# Altium PCB Motor_Driver_IR2184_Board_V1.0.PcbDoc
Units mil, origin at the board's own origin, x right, y up, seen from the top; angles counter-clockwise.
Board outline 3070.87 x 1692.91 mil, 4 copper layers (TOP, GND02, POWER03, Bottom), stack 23.756 mil thick; 65 components, 43 nets, 188 pads, 240 vias.
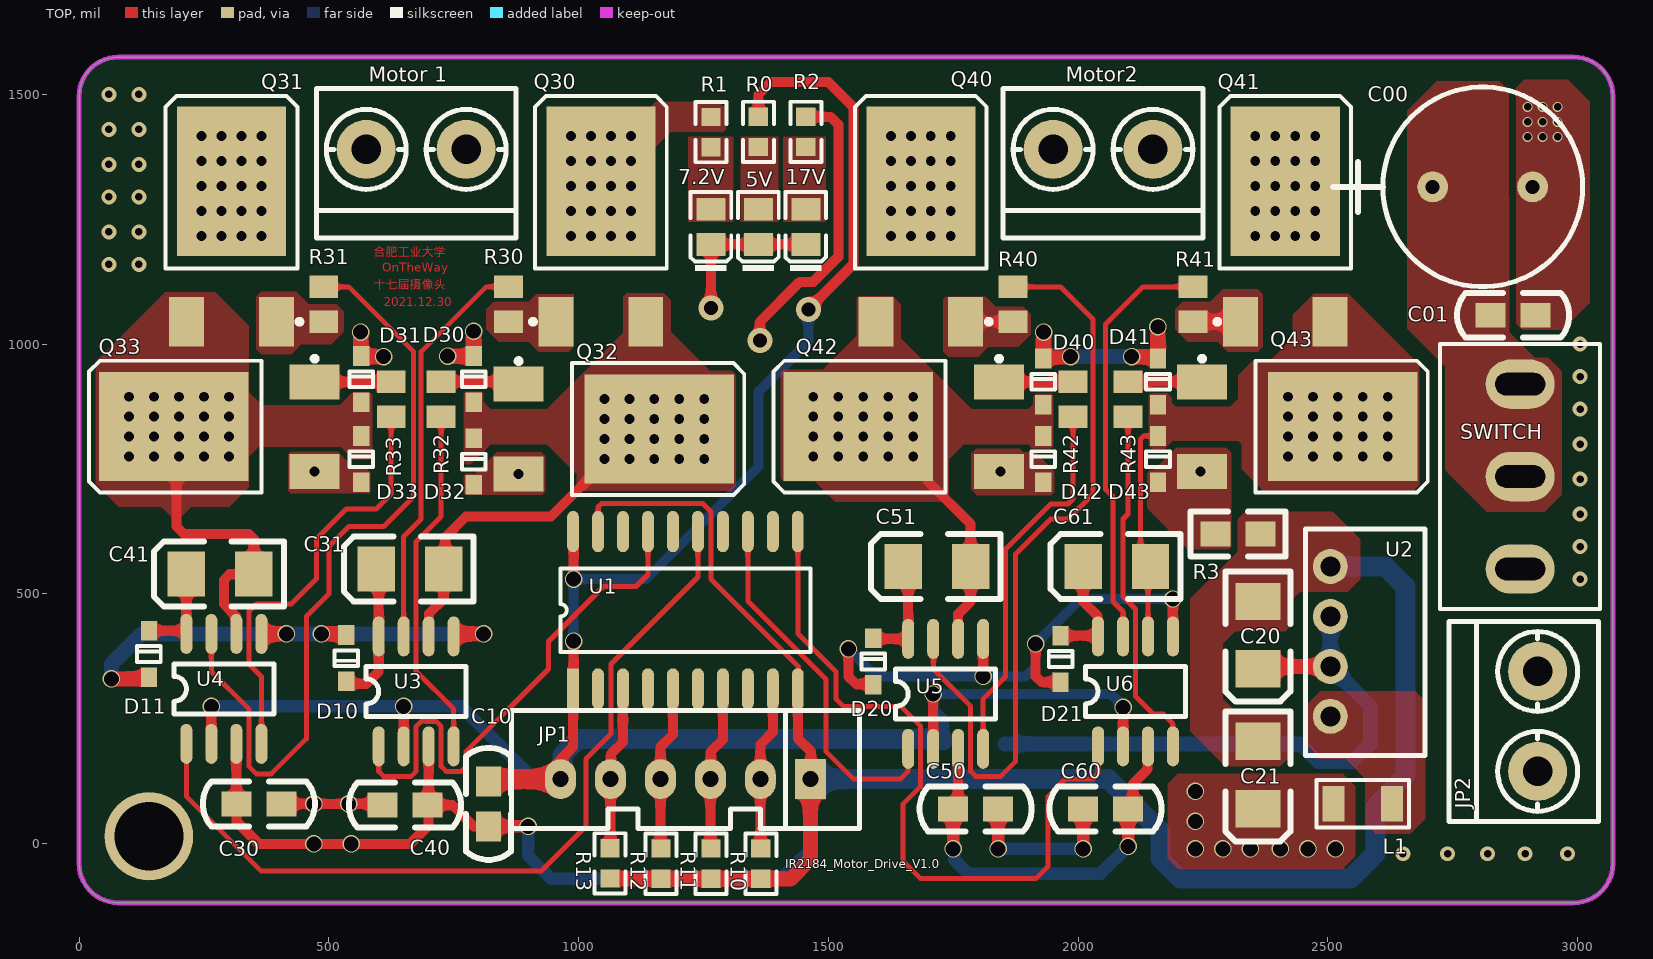
[diagram p0: TOP view]
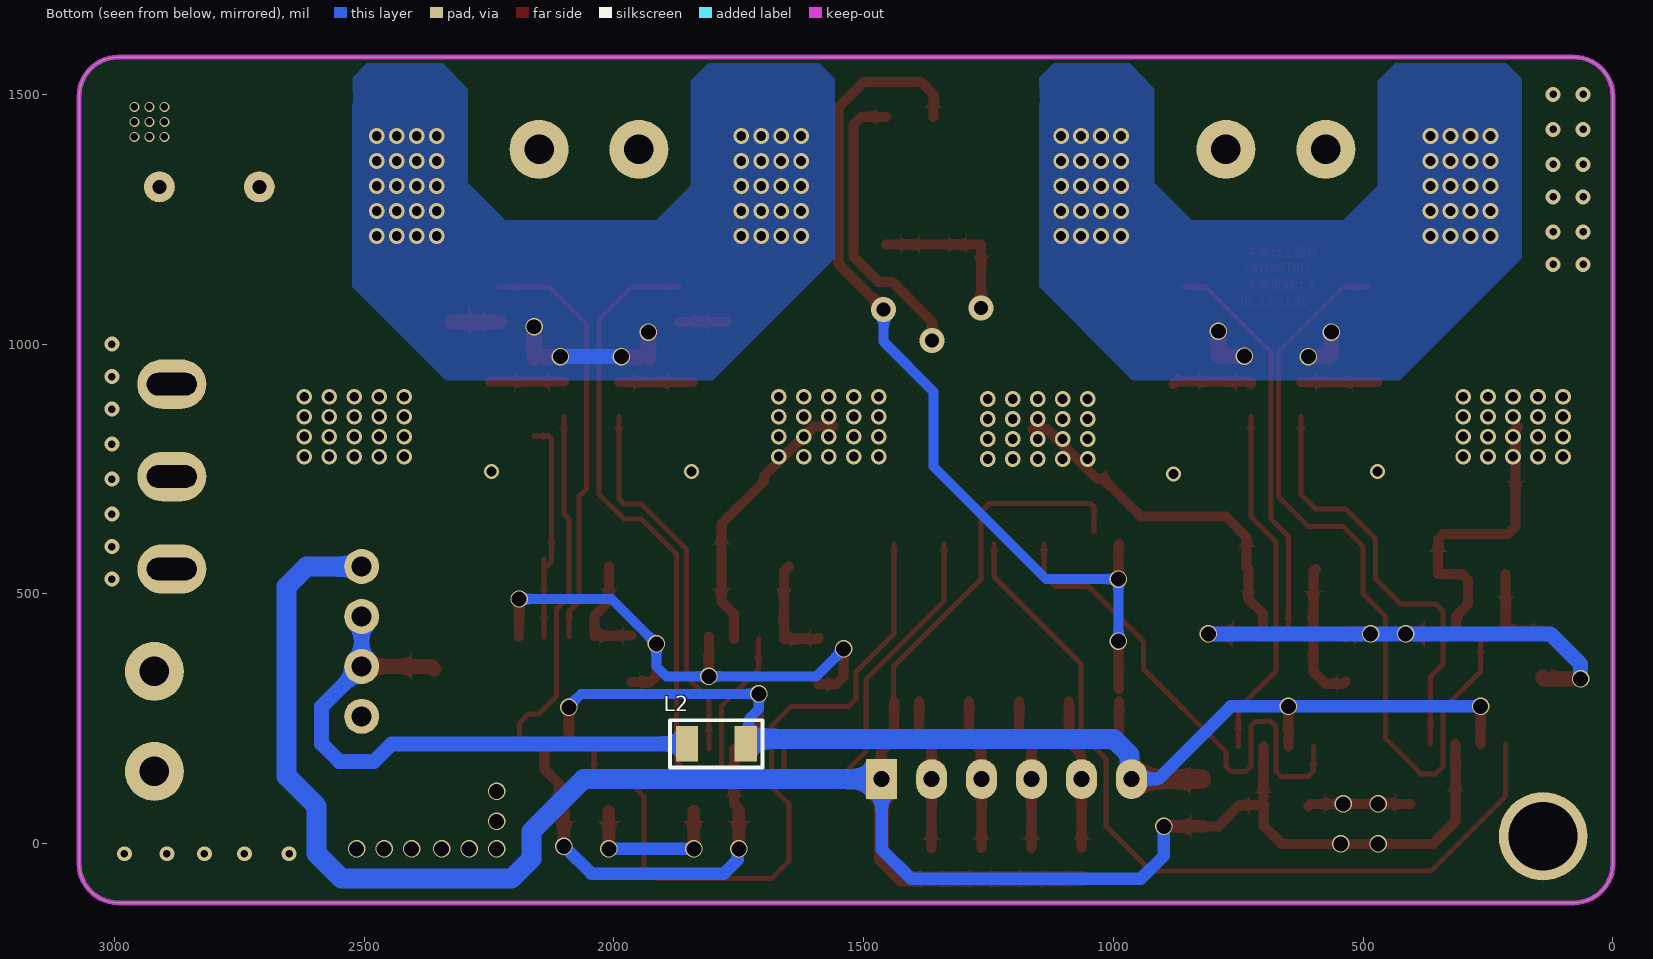
[diagram p1: Bottom view, seen from below]
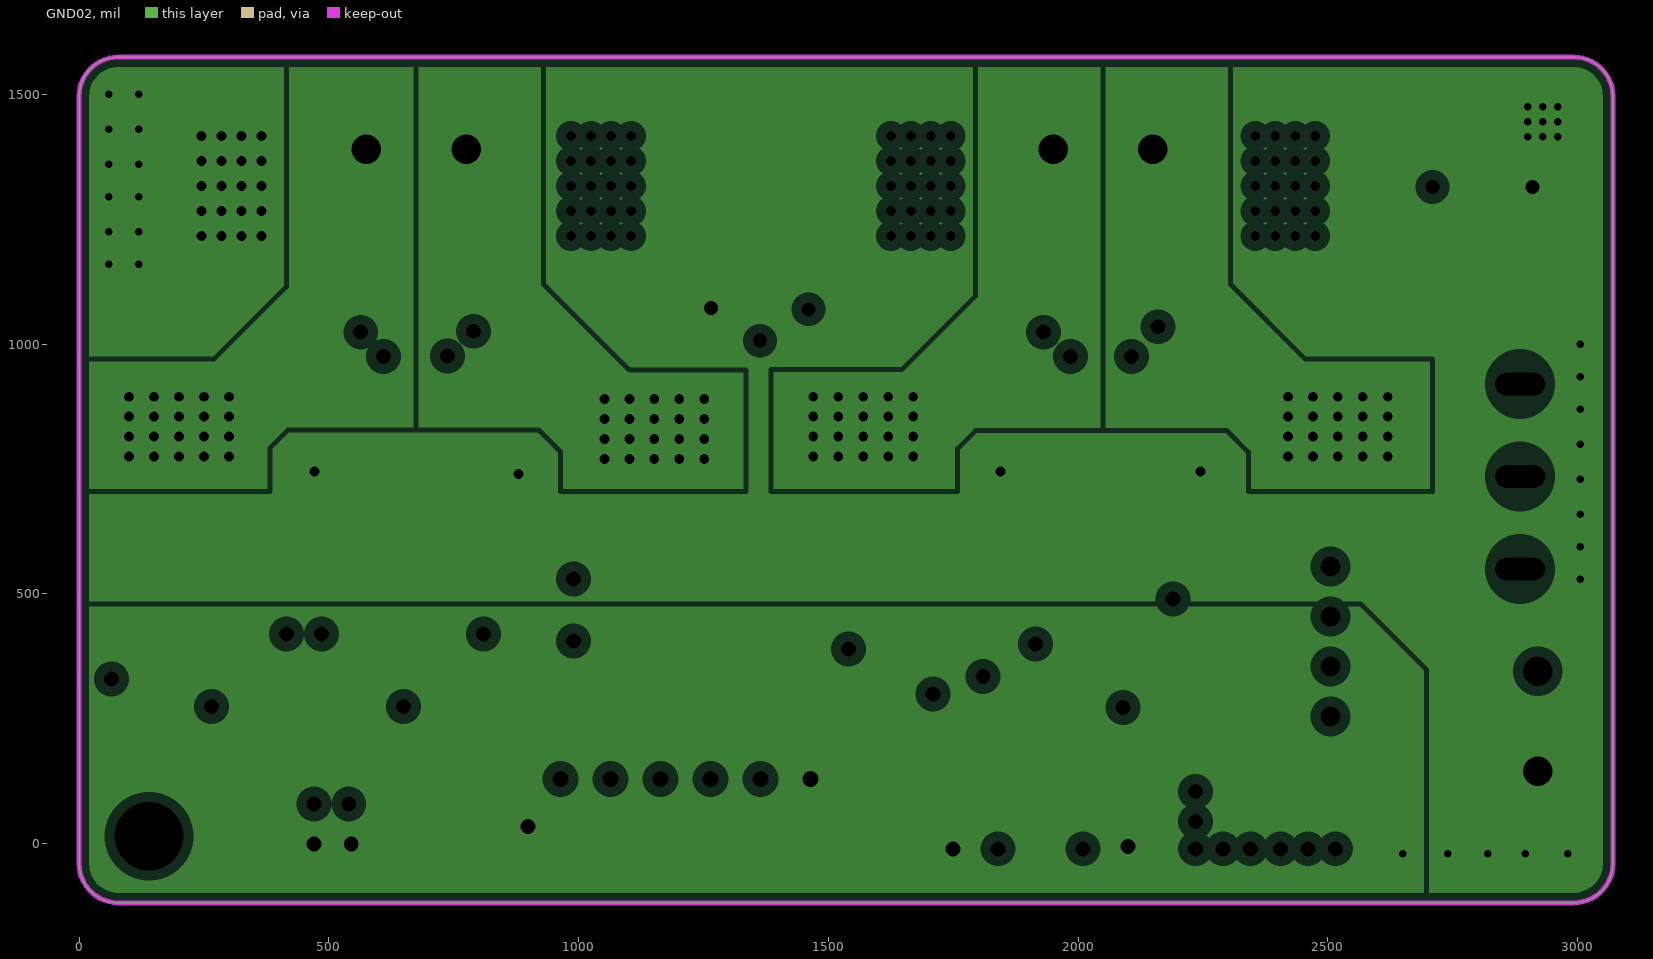
[diagram p2: GND02, clearances drawn from the general rule]
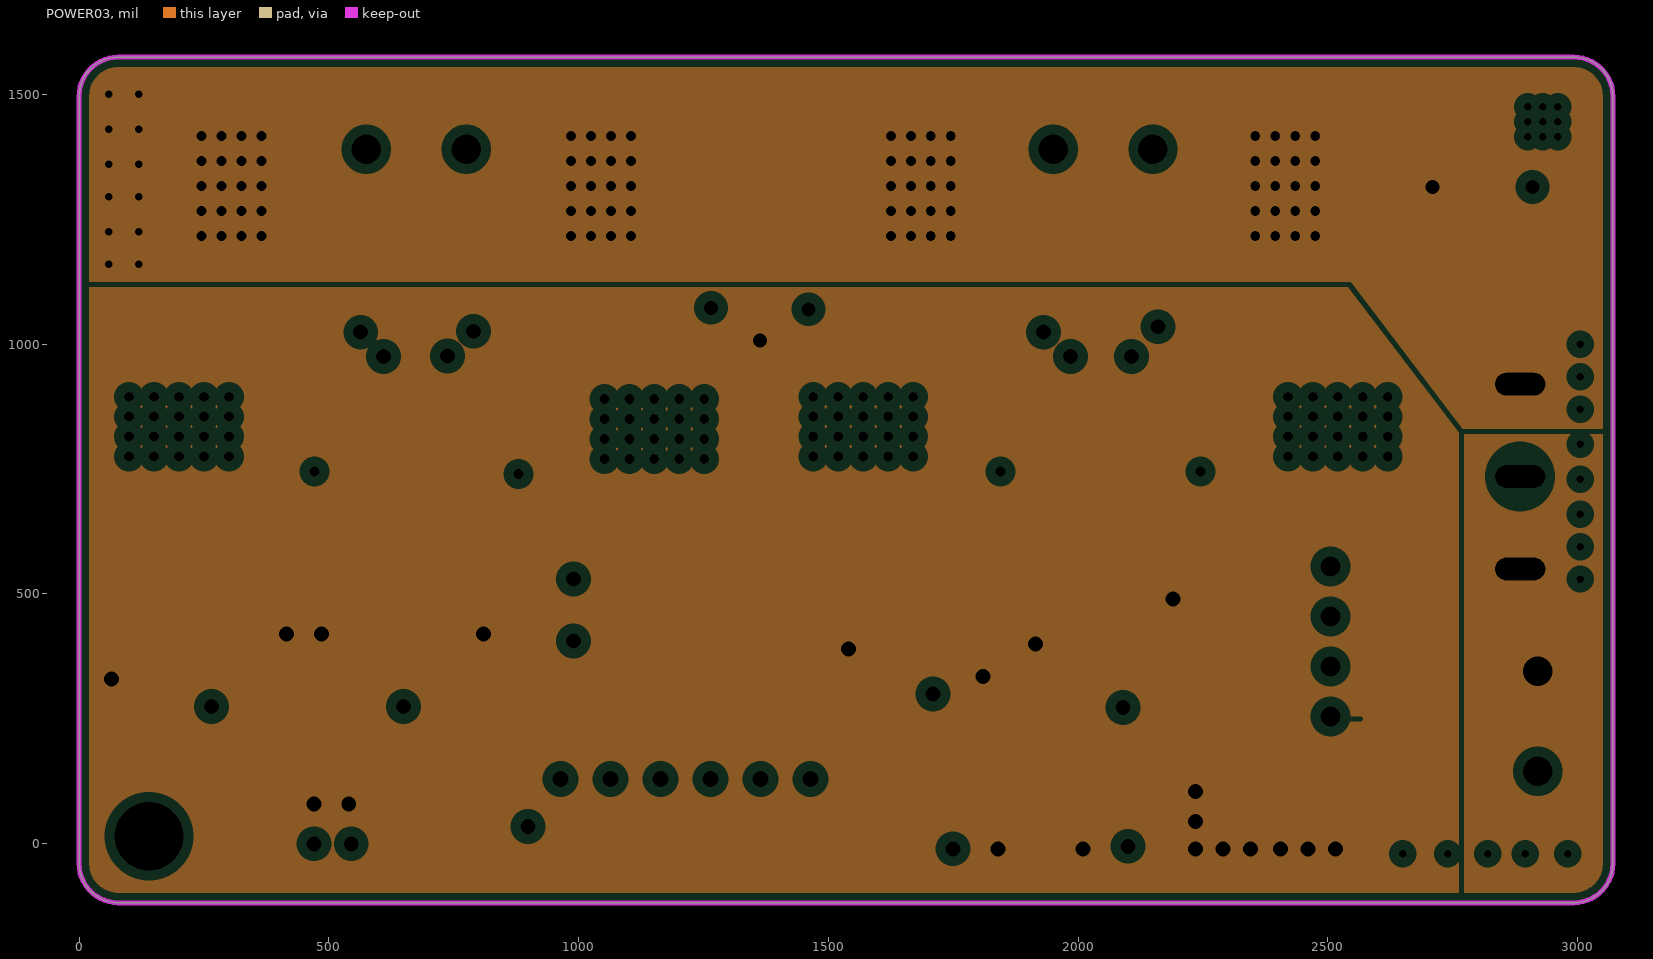
[diagram p3: POWER03, clearances drawn from the general rule]
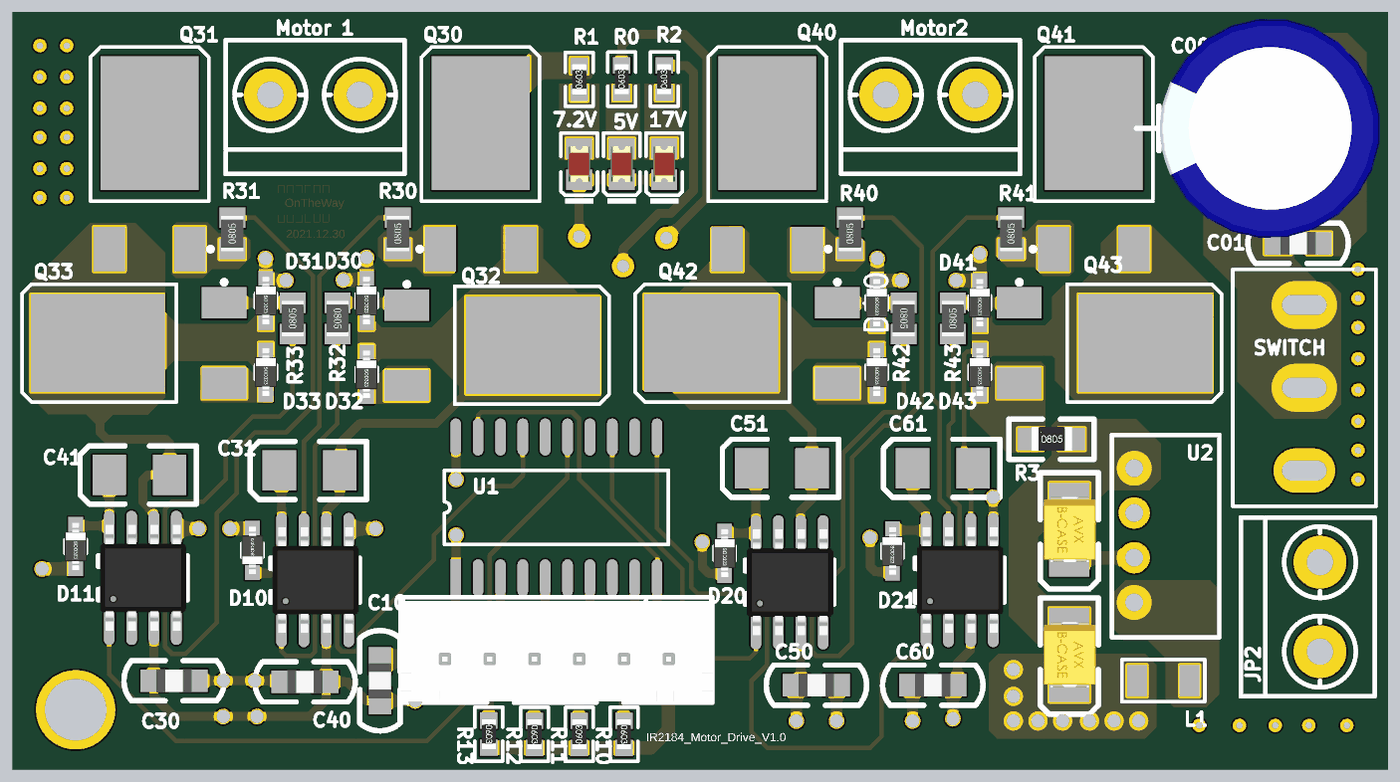
[diagram p4: 3D render of the assembled board from above, using the file's embedded part models]

## Layer stack, top to bottom
Top Solder: solder mask 0.4, Solder Resist, Dk 3.5
TOP: signal copper 1.4
Dielectric 2: prepreg 2.8, PP-006, Dk 4.1
GND02: plane copper 1.378, net (Multiple Nets)
Dielectric 1: dielectric 12.6, FR-4, Dk 4.8
POWER03: plane copper 1.378, net (Multiple Nets)
Dielectric 3: prepreg 2.8, PP-006, Dk 4.1
Bottom: signal copper 1.4
Bottom Solder: solder mask 0.4, Solder Resist, Dk 3.5

## Board outline
0,-39.37 ccw(c78.74,-39.37) 78.74,-118.11 78.52,-118.11 2992.12,-118.11 2992.13,-118.11 ccw(c2992.13,-39.37) 3070.87,-39.37 3070.87,1496.06 ccw(c2992.13,1496.06) 2992.13,1574.8 78.74,1574.8 ccw(c78.74,1496.06) 0,1496.06

## Design rules (kind name [scope] priority, off if disabled: settings)
Clearance [All] p1: gap=2 ignorepadtopadclearanceinfootprint=FALSE
HoleSize [All] p1 off: absolutevalues=TRUE maxlimit=100 minlimit=1 maxpercent=80.000 minpercent=20.000
HoleToHoleClearance [All] p1 off: gap=10 allowstackedmicrovias=TRUE
MinimumSolderMaskSliver [All] p1 off: minsoldermaskwidth=10
PlaneClearance [All] p1: clearance=20
PlaneConnect [All] p1: planeconnectstyle=Direct reliefexpansion=20 reliefentries=4 reliefconductorwidth=10 reliefairgap=10
PolygonConnect [All] p1: connectstyle=Direct reliefconductorwidth=10 reliefentries=4 polygonreliefangle="90 Angle" airgapwidth=10
RoutingVias [All] p1: holewidth=28 width=50 viastyle="Through Hole" minholewidth=28 minwidth=50 maxholewidth=28 maxwidth=50
SilkToSilkClearance [All] p1 off: silktosilkclearance=10
SilkToSolderMaskClearance [IsPad] p1 off: minsilkscreentomaskgap=10 clearancetoexposedcopper=TRUE
SolderMaskExpansion [All] p1: expansion=4
Width PGND [InNet('PGND')] p1: maxlimit=50 minlimit=10 preferedwidth=30
Width GND [InNet('GND')] p2: maxlimit=50 minlimit=10 preferedwidth=30
Width 12V [InNet('12V')] p3: maxlimit=50 minlimit=10 preferedwidth=30
Width "7.2V In" [InNet('7.2V In')] p4: maxlimit=50 minlimit=10 preferedwidth=30
Width 7.2V [InNet('7.2V')] p5: maxlimit=50 minlimit=10 preferedwidth=30
Width 5V [InNet('5V')] p6: maxlimit=50 minlimit=10 preferedwidth=30
Width [All] p7: maxlimit=30 minlimit=10 preferedwidth=20
23 further rules are at their usual default settings.

## Components (designator, comment, footprint, x,y, rotation, side; value= is the part's Value field where it differs from the comment)
5V "" 0805_LED_S1 1360,1235 r90 top
7.2V "" 0805_LED_S1 1265,1235 r90 top
17V "" 0805_LED_S1 1455,1235 r90 top
C00 "470uF/25V" RB.2/.4 2710,1315 r180 top
C01 "100nF" 0805C 2916,1058 r180 top
C10 "100nF" 0805C 820,125 r270 top
C20 "" 3528 2360,350 r270 top value=4.7uF/25V
C21 "" 3528 2360,70 r270 top value=10uF/16V
C30 "100nF" 0805C 405,80 r180 top
C31 "10uF/35V" 3528 595,550 r180 top
C40 "100nF" 0805C 607.5,77.5 r0 top
C41 "10uF/35V" 3528 215,540 r180 top
C50 "100nF" 0805C 1840,70 r180 top
C51 "10uF/35V" 3528 1650,555 r180 top
C60 "100nF" 0805C 2010,70 r0 top
C61 "10uF/35V" 3528 2010,555 r180 top
D10 "1N5819" SOD-323 535,371.46 r90 top
D11 "1N5819" SOD-323 140,380 r270 top
D20 "1N5819" SOD-323 1590,365 r270 top
D21 "1N5819" SOD-323 1965,370 r270 top
D30 "1N5819" SOD-323 790,930 r270 top
D31 "1N5819" SOD-323 565,930 r270 top
D32 "1N5819" SOD-323 790,765 r270 top
D33 "1N5819" SOD-323 565,770 r270 top
D40 "1N5819" SOD-323 1930,925 r270 top
D41 "1N5819" SOD-323 2160,925 r270 top
D42 "1N5819" SOD-323 1930,770 r270 top
D43 "1N5819" SOD-323 2160,770 r270 top
JP1 "HEADER 6" SIP6N 1464,129.44 r180 top
JP2 "HEADER 2" KF301-2P#1 2920,245 r180 top
L1 "6.8uH" 1206_L 2570,80 r180 top
L2 "6.8uH" 1206_L 1795,200 r180 bottom
Motor2 "HEADER 2" KF301-2P#1 2050,1390 r270 top
"Motor 1" "HEADER 2" KF301-2P#2 675,1390 r270 top
Q30 "IR7843" LR7843#1 1044.76,1186.73 r270 top
Q31 "IR7843" LR7843#2 305.24,1186.73 r270 top
Q32 "IR7843" LR7843#1 1021.73,830.24 r180 top
Q33 "IR7843" LR7843#2 330,835 r0 top
Q40 "IR7843" LR7843#2 1685.24,1186.73 r270 top
Q41 "IR7843" LR7843#1 2414.76,1186.73 r270 top
Q42 "IR7843" LR7843#2 1700,835 r0 top
Q43 "IR7843" LR7843#1 2390,835 r180 top
R0 "4.7K" 0603_R 1360,1425 r90 top
R1 "4.7K" 0603_R 1265,1424.69 r90 top
R2 "4.7K" 0603_R 1455,1425 r90 top
R3 "0" 0805R 2275,620 r0 top
R10 "10K" 0603_R 1365,-40 r270 top
R11 "10K" 0603_R 1265,-40 r90 top
R12 "10K" 0603_R 1165,-40 r270 top
R13 "10K" 0603_R 1062.99,-39.37 r270 top
R30 "20" 0805 860,1080 r90 top
R31 "20" 0805 490,1080 r90 top
R32 "20" 0805 725,890 r270 top
R33 "20" 0805 625,890 r90 top
R40 "20" 0805 1870,1080 r90 top
R41 "20" 0805 2230,1080 r90 top
R42 "20" 0805 1990,890 r270 top
R43 "20" 0805 2100,890 r90 top
SWITCH "Header 3" KEY-3P 2885,920.08 r90 top
U1 "74HC245" SOP20 989,310 r90 top
U2 "B0512S-1W" SIP4_B_S-1W 2455,177 r0 top
U3 "IR2184" SO-8 600,195 r90 top
U4 "IR2184" SO-8 215,200 r90 top
U5 "IR2184" SO-8 1660,190 r90 top
U6 "IR2184" SO-8 2040,195 r90 top

## Footprints (in the part's own frame and the unit in brackets; to place one, negate y for a bottom-side part, rotate by r counter-clockwise, add the part's x,y. Pads: shape width x height; smd on the part's side, far side on the other; paste and mask are expansions set on the pad)
0603_R [mm]
  rect 0.93x0.98 smd: 1(-0.77,0) 2(0.77,0)
  silkscreen extent -1.53,-0.79 1.54,0.79, body extent -0.85,-0.4 0.85,0.4, height 0.56
0805 [mm]
  rect 1.16x1.47 smd: 1(-0.89,0) 2(0.89,0)
  body extent -1,-0.63 1,0.63, height 0.55
0805_LED_S1 [mm]
  rect 1.16x1.47 smd: A(0.89,0) K(-0.89,0)
  silkscreen extent -2.24,-1.04 1.77,1.03, body extent -1.01,-0.62 1.01,0.62, height 1.1
0805C [mil]
  rect 60x50 smd: 1(0,0) 2(90,0)
  silkscreen extent -67,-45 157,45, body extent 6,-26 84,26, height 29
0805R [mil]
  rect 60x50 smd: 1(0,0) 2(90,0)
  silkscreen extent -50,-45 140,45, body extent 1,-26 91,28, height 30
1206_L [mm]
  rect 1.13x1.8 smd: 1(-1.49,0) 2(1.49,0)
  silkscreen extent -2.36,-1.2 2.35,1.2
3528 [mil]
  rect 75x90 smd: 1(0,0) 2(-135,0)
  silkscreen extent -195,-65 65,65, body extent -141,-57 5,59, height 80
KEY-3P [mil]
  oval 99x138 hole 45 slot 100 at 90 deg: 1(-370.08,0) 2(-185.04,0) 3(0,0)
  silkscreen extent -450,-160 80,160
KF301-2P#1 [mm]
  round 3 hole 1.5: 1(0,2.54) 2(0,-2.54)
  silkscreen extent -3.1,-5.08 4.5,5.08
KF301-2P#2 [mm]
  round 3 hole 1.5: 1(0,-2.54) 2(0,2.54)
  silkscreen extent -3.1,-5.08 4.5,5.08
LR7843#1 [mm]
  rect 7.6x5.55 smd: 1(-3.556,0)
  rect 2.54x1.778 smd: 2(3.6,-2.28) 3(3.6,2.28)
  silkscreen extent -7.87,-3.58 3.72,3.35
LR7843#2 [mm]
  rect 7.6x5.55 smd: 1(-3.556,0)
  rect 2.54x1.778 smd: 2(3.6,2.28) 3(3.6,-2.28)
  silkscreen extent -7.87,-3.35 3.72,3.58
RB.2/.4 [mil]
  round 62 hole 28: 1(0,0) 2(-200,0)
  silkscreen extent -300,-200 200,200, body extent -345,-246 147,246, height 986
SIP4_B_S-1W [mil]
  round 70 hole 40: 1(50,378) 2(50,278) 3(50,178) 4(50,78)
  silkscreen extent 0,0 240,453
SIP6N [mil]
  rect 62x80 hole 32: 1(0,0)
  oval 62x80 hole 32: 2(100,0) 3(200,0) 4(300,0) 5(400,0) 6(500,0)
  silkscreen extent -98,-138 598,98, body extent -99,-129 597,95, height 277
SO-8 [mil]
  oval 80x24 smd: 1(0,0) 2(0,-50) 3(0,-100) 4(0,-150) 5(220,-150) 6(220,-100) 7(220,-50) 8(220,0)
  silkscreen extent 60,-175 160,25, body extent -8,-172 228,20, height 67
SOD-323 [mm]
  rect 1x0.83 smd: 1(1.18,0) 2(-1.18,0)
  silkscreen extent -0.4,-0.6 0.4,0.6, body extent -1.35,-0.62 1.35,0.63, height 1.1
SOP20 [mm]
  rect 2.1x0.6 smd: 1(0,0)
  oval 2.1x0.6 smd: 2(0,-1.27) 3(0,-2.54) 4(0,-3.81) 5(0,-5.08) 6(0,-6.35) 7(0,-7.62) 8(0,-8.89) 9(0,-10.16) 10(0,-11.43) 11(8,-11.43) 12(8,-10.16) 13(8,-8.89) 14(8,-7.62) 15(8,-6.35) 16(8,-5.08) 17(8,-3.81) 18(8,-2.54) 19(8,-1.27) 20(8,0)
  silkscreen extent 1.89,-12.06 6.11,0.64

## Part data
5V 7.2V 17V: library part LED
C00 C31 C41 C51 C61: library part CAPACITOR, "Capacitor"
C01 C10 C30 C40 C50 C60: library part CAP, "Capacitor"
C20 C21: library part "Cap Pol3", "Polarized Capacitor (Surface Mount)", LatestRevisionDate=29-May-2009, LatestRevisionNote="IPC-7351 Footprint Added.", PackageDescription="Chip Capacitor", PackageReference=C0805, Published=8-Jun-2000, Publisher="Altium Limited"
D10 D11 D20 D21: library part Diode, "Default Diode", Code_JEDEC=DO-214-AB, LatestRevisionDate=17-Jul-2002, LatestRevisionNote="Re-released for DXP Platform.", PackageDescription="DO-214-AB/SMC; 2 C-Bend Leads; Body 7.9 x 5.9 mm, inc. leads (LxW)", PackageReference=SMC, PackageVersion=Sep-1996, Published=8-Jun-2000, Publisher="Altium Limited"
D30 D31 D32 D33 D40 D41 D42 D43: library part "DIODE SCHOTTKY", "Schottky Diode"
L1 L2: library part INDUCTOR2
Q30 Q31 Q32 Q33 Q40 Q41 Q42 Q43: library part MOSFET-N, "N-Channel MOSFET", LatestRevisionDate=17-Jul-2002, LatestRevisionNote="Re-released for DXP Platform.", PackageDescription="TO, Flat Index; 3 In-Line, Axial Leads; Body Dia. 4.6mm; Lead Dia. 0.5 mm (max)", PackageReference=E3, PackageVersion=1995/1996, Published=8-Jun-2000, Publisher="Altium Limited"
R0 R1 R2 R3 R10 R11 R12 R13 R30 R31 R32 R33 R40 R41 R42 R43: library part RES2
SWITCH: "Header, 3-Pin", LatestRevisionDate=17-Jul-2002, LatestRevisionNote="Re-released for DXP Platform.", Publisher="Altium Limited"
U2: library part "4 HEADER", "4 Pin Header"

## Free pads (board coordinates)
  round 177.17 hole 137.8: 2(140,15)

## Via types
v1: diameter 31.5, hole 19.68, TOP to Bottom, 160 vias
v2: diameter 35, hole 30, TOP to Bottom, 39 vias
v3: diameter 30, hole 15, TOP to Bottom, 25 vias
v4: diameter 20, hole 15, TOP to Bottom, 9 vias
v5: diameter 30, hole 20, TOP to Bottom, 4 vias
v6: diameter 50, hole 28, TOP to Bottom, 3 vias

## Nets (pads, with @x,y where several pads share a name; then routed paths per layer and width w, separated by ;. In a path a pad name is that pad's centre, name@x,y a point inside that pad or via, vN(x,y) a via of type N, cw(c..) or ccw(c..) an arc to the next point about the centre after c; other vN are vias at no path point)
5V: C10.1 JP1.6 L2.2 R0.2 U1.1 U1.20 U3.2 U4.2 U5.2 U6.2 | length 4508.2
  TOP w20: U4.2 v2(265,275) ; U3.2 v2(650,275) ; C10.1 C10.1@824.44,129.44 ; JP1.6@963,129.44 963,168 989,194 U1.1@989,285 ; U1.1 990,311 v2(990,405.48) ; U1.20@989,599.96 990,598.96 v2(990,530) ; R0.2 1360,1500 1385,1525 1500,1525 1550,1475 1550,1160 v6(1460,1070) ; U5.2@1710,200 v2(1710,300) ; U6.2@2090,205 v2(2090,273.21)
  TOP w40: C10.1@824.44,129.44 JP1.6@963,129.44
  Bottom w20: v2(990,405.48) v2(990,530) 1135,530 1360,755 1360,905 1460,1005 v6(1460,1070) ; L2.2 1730,206.34 1730,250 1710,270 v2(1710,300) 2065.94,300 2090,275.94 v2(2090,273.21)
  Bottom w25: v2(265,275) v2(650,275) 765,275 910.14,129.86 963.59,129.86 JP1.6
  Bottom w40: JP1.6@967.5,162.5 967.5,177.5 1000,210 1726.34,210 L2.2@1730,206.34
7.2V: C00.1 C01.2 D30.2 D31.2 D40.2 D41.2 Q30.1 Q31.1 Q40.1 Q41.1 R1.2 SWITCH.2 SWITCH.3 | length 545.2
  TOP w30: v2(564,1024) 564,977.46 D31.2 565,976.34 566.34,975 v2(610,975) ; v2(738,976) 789.53,976 D30.2 v2(790,1026) ; v2(1931,1024) D40.2@1931,974.66 ; v2(1985,975) 1931.34,975 D40.2@1931,974.66 ; v2(2107,975) 2158.66,975 D41.2@2160,973.66 ; D41.2 D41.2@2160,973.66 ; v2(2160,1035) D41.2@2160,973.66 ; D40.2@1931,974.66 1931,972.46 D40.2 1930,973.66 D40.2@1931,974.66
  Bottom w30: v2(1985,975) v2(2107,975)
  other v1: 245.24,1216.73 285.24,1216.73 325.24,1216.73 365.24,1216.73 984.76,1216.73 1024.76,1216.73 1064.76,1216.73 1104.76,1216.73 1625.24,1216.73 1665.24,1216.73 1705.24,1216.73 1745.24,1216.73 2354.76,1216.73 2394.76,1216.73 2434.76,1216.73 2474.76,1216.73 245.24,1266.73 285.24,1266.73 325.24,1266.73 365.24,1266.73 984.76,1266.73 1024.76,1266.73 1064.76,1266.73 1104.76,1266.73 1625.24,1266.73 1665.24,1266.73 1705.24,1266.73 1745.24,1266.73 2354.76,1266.73 2394.76,1266.73 2434.76,1266.73 2474.76,1266.73 245.24,1316.73 285.24,1316.73 325.24,1316.73 365.24,1316.73 984.76,1316.73 1024.76,1316.73 1064.76,1316.73 1104.76,1316.73 1625.24,1316.73 1665.24,1316.73 1705.24,1316.73 1745.24,1316.73 2354.76,1316.73 2394.76,1316.73 2434.76,1316.73 2474.76,1316.73 245.24,1366.73 285.24,1366.73 325.24,1366.73 365.24,1366.73 984.76,1366.73 1024.76,1366.73 1064.76,1366.73 1104.76,1366.73 1625.24,1366.73 1665.24,1366.73 1705.24,1366.73 1745.24,1366.73 2354.76,1366.73 2394.76,1366.73 2434.76,1366.73 2474.76,1366.73 245.24,1416.73 285.24,1416.73 325.24,1416.73 365.24,1416.73 984.76,1416.73 1024.76,1416.73 1064.76,1416.73 1104.76,1416.73 1625.24,1416.73 1665.24,1416.73 1705.24,1416.73 1745.24,1416.73 2354.76,1416.73 2394.76,1416.73 2434.76,1416.73 2474.76,1416.73
  other v3: 60,1160 120,1160 60,1225 120,1225 60,1295 120,1295 60,1360 120,1360 60,1430 120,1430 60,1500 120,1500
"7.2V In": JP2.2 SWITCH.1
17V: C21.1 C30.1 C40.1 C50.1 C60.1 D10.1 D11.1 D20.1 D21.1 L1.2 R2.2 U3.5 U4.5 U5.5 U6.5 | length 3275.9
  TOP w20: C30.1 v2(470,80) v2(540,80) 605,80 C40.1 C40.1@610,75 ; v6(1363,1007) 1363,1045 1443,1125 1470,1125 1520,1175 1520,1440 1504.68,1455.32 R2.2 ; v2(1540,390) 1540,335 1555.38,319.62 1588.92,319.62 D20.1 ; v2(1810,335) U5.5 U5.5@1810,415 ; v2@1915,395 1915,335.26 1926.72,323.54 D21.1 ; U6.5 v2(2190,490)
  TOP w25: v2(1840,-10) C50.1@1840,65 ; v2(2010,-10) C60.1@2010,65
  TOP w30: v2(65,330) 138.66,330 140,331.34 D11.1 ; U4.5@375,420 v2(415,420) ; v2(485,420) 533.66,420 535,418.66 D10.1 ; U3.5@760,420 v2(810,420)
  Bottom w20: v2(1540,390) 1595,335 v2(1810,335) 1895,335 1915,355 v2(1915,400) 2005,490 v2(2190,490)
  Bottom w25: v2(1840,-10) v2(2010,-10)
  Bottom w30: v2(65,330) 65,360 125,420 v2(415,420) v2(485,420) v2(810,420)
  other v2: 2235,-10 2290,-10 2345,-10 2405,-10 2460,-10 2515,-10 2235,45 2235,105
AHO1: R30.2 U3.7 | length 813.4
  TOP w10: U3.7 650,615 685,650 685,985 815.04,1115.04 R30.2
AHO2: R40.2 U5.7 | length 1559.3
  TOP w10: U5.7 1710.59,409.41 1710.59,349.41 1785,275 1785,145 1795,135 1845,135 1875,165 1875,580 1945,650 1980,650 2030,700 2030,1050 1964.96,1115.04 R40.2
AHS1: "Motor 1.2" C31.2 D30.1 D32.2 Q30.3 Q32.1 U3.6 | length 730.4
  TOP w20: U3.6 700.77,415.77 700.77,460.77 730,490 C31.2 733.28,553.28 733.28,613.28 775,655 945,655 1020.98,730.98 1034.2,730.98 1133.45,830.24 Q32.1
  other v1: 1051.73,770.24 1101.73,770.24 1151.73,770.24 1201.73,770.24 1251.73,770.24 1051.73,810.24 1101.73,810.24 1151.73,810.24 1201.73,810.24 1251.73,810.24 1051.73,850.24 1101.73,850.24 1151.73,850.24 1201.73,850.24 1251.73,850.24 1051.73,890.24 1101.73,890.24 1151.73,890.24 1201.73,890.24 1251.73,890.24
AHS2: C51.2 D40.1 D42.2 Motor2.2 Q40.3 Q42.1 U5.6 | length 552.2
  TOP w20: Q42.1 1600.35,835 1699.61,735.75 1699.61,725.39 1785,640 C51.2 1785,485 1760,460 U5.6
  other v1: 1470,775 1520,775 1570,775 1620,775 1670,775 1470,815 1520,815 1570,815 1620,815 1670,815 1470,855 1520,855 1570,855 1620,855 1670,855 1470,895 1520,895 1570,895 1620,895 1670,895
ALO1: R32.2 U3.4 | length 711.7
  TOP w10: R32.2 725,655 675,605 675,345 750,270 U3.4
ALO2: R42.2 U5.4 | length 760
  TOP w10: U5.4 1810,290 1855,335 1855,590 1945,680 1980,680 1990,690 R42.2
BHO1: R31.2 U4.7 | length 1585.2
  TOP w10: U4.7 265,345 340,270 340,155 355,140 385,140 455,210 455,455 500,500 500,595 540,635 610,635 670,695 670,985 540,1115 R31.2 R31.2
BHO2: R41.2 U6.7 | length 845.6
  TOP w10: U6.7 2090,465 2070,485 2070,695 2055,710 2055,1040 2130.04,1115.04 R41.2
BHS1: "Motor 1.1" C41.2 D31.1 D33.2 Q31.3 Q33.1 U4.6 | length 620.9
  TOP w20: Q33.1 195,830 195,635 210,620 340,620 350,610 C41.2 301.72,540 290,528.28 290,480 314.23,455.77 314.23,420.77 U4.6
  other v1: 100,775 150,775 200,775 250,775 300,775 100,815 150,815 200,815 250,815 300,815 100,855 150,855 200,855 250,855 300,855 100,895 150,895 200,895 250,895 300,895
BHS2: C61.2 D41.1 D43.2 Motor2.1 Q41.3 Q43.1 U6.6 | length 451.8
  TOP w10: C61.2@2135,555 2125,565 2125,810 2131.46,816.46 D43.2 ; U6.6 2140,555 C61.2@2140,570
  other v1: 2420,775 2470,775 2520,775 2570,775 2620,775 2420,815 2470,815 2520,815 2570,815 2620,815 2420,855 2470,855 2520,855 2570,855 2620,855 2420,895 2470,895 2520,895 2570,895 2620,895
BLO1: R33.1 U4.4 | length 859.5
  TOP w10: U4.4 365,335 340,360 340,465 355,480 425,480 475,530 475,610 535,670 595,670 625,700 R33.1
BLO2: R43.1 U6.4 | length 717.2
  TOP w10: R43.1 2100,660 2090,650 2090,495 2115,470 2115,295 2150,260 2170,260 2189.41,240.59 2189.41,195.59 U6.4
GND: C10.2 C20.2 C21.2 C30.2 C40.2 C50.2 C60.2 JP1.1 R3.2 R10.2 R11.1 R12.2 R13.2 U1.10 U1.19 U2.1 U3.3 U4.3 U5.3 U6.3 | length 6030.1
  TOP w10: U1.19 1039,674 1045.86,680.86 1249.14,680.86 1265,665 1265,530 1440,355 1440,286 U1.10@1439,285
  TOP w20: U4.3 C30.2 315,45 360,0 663.28,0 700,36.72 C40.2@700,75 ; C40.2 747.5,77.5 790,35 C10.2 ; C40.2@700,90 U3.3 ; U1.10@1439,285 1439,211 1465,185 1465,98 JP1.1@1464,97 ; C50.2 1760,80 U5.3 ; C60.2 2110,80 2110,120 2139.23,149.23 2139.23,194.23 U6.3
  TOP w25: C10.2 C10.2 v2(899,34.96) ; v2(1750,-10) C50.2@1750,65 ; v2(2100,-5) C60.2@2100,60
  TOP w30: R13.2 1164.37,-69.69 R12.2 R11.1 R10.2 1424.68,-70.32 1464,-31 JP1.1@1464,97
  Bottom w25: v2(899,34.96) 899,-24 945,-70 1405,-70 1464,-11 JP1.1 ; v2(1750,-10) 1751.91,-11.91 1751.91,-31.91 1780,-60 2045,-60 v2(2100,-5)
  Bottom w40: JP1.1 2060.56,129.44 2165,25 2165,-30 2205,-70 2545,-70 2595,-20 2595,75 2655,135 2655,515 2615,555 U2.1
  other v2: 470,0 545,0
  other v3: 2650,-20
Motor_In1: U1.17 U3.1 | length 1054.4
  TOP w10: U3.1 600,145 610,135 665,135 675,145 675,235 685.86,245.86 694.14,245.86 695,245 715,245 725,235 725,155 735,145 765,145 775,155 775,185 940,350 940,405 1050,515 1115,515 1139,539 U1.17@1139,599.96
Motor_In2: U1.15 U4.1 | length 1662.2
  TOP w10: U4.1 215,95 365,-55 925,-55 1015,35 1015,170 1065,220 1065,360 1239,534 U1.15@1239,599.96
Motor_In3: U1.13 U5.1 | length 718.6
  TOP w10: U1.13@1339,599.96 1339,486 1495,330 1495,185 1550,130 1645,130 1660,145 U5.1
Motor_In4: U1.11 U6.1 | length 1447.2
  TOP w10: U1.11@1439,599.96 1439,421 1515,345 1515,290 1530,275 1645,275 1685,235 1685,115 1650,80 1650,-35 1685,-70 1915,-70 1940,-45 1940,95 1975,130 2030,130 2040,140 U6.1
Net5V_A: 5V.A R0.1
Net7.2V_A: 7.2V.A R1.1
Net17V_A: 17V.A R2.1
NetC20_1: C20.1 L2.1 U2.2 U2.3 | length 1195.5
  TOP w30: C20.1 2365,355 U2.3
  Bottom w30: L2.1 2445,200 2480,165 2550,165 2585,200 2585,275 U2.3 U2.2
NetC31_1: C31.1 D10.2 U3.8 | length 284.5
  TOP w20: D10.2 540,320 575,320 600,345 U3.8 600,545 C31.1
NetC41_1: C41.1 D11.2 U4.8 | length 195.8
  TOP w20: D11.2 213.15,426.46 U4.8@215,424.61 ; U4.8 U4.8@215,424.61 ; C41.1 U4.8@215,424.61
NetC51_1: C51.1 D20.2 U5.8 | length 219.7
  TOP w20: D20.2 1591.46,410 U5.8 1660,545 C51.1
NetC61_1: C61.1 D21.2 U6.8 | length 225.9
  TOP w20: D21.2 2038.54,416.46 2039.23,415.77 2039.23,455.77 2010,485 C61.1
NetL1_1: L1.1 U2.4
NetQ30_2: Q30.2 R30.1
NetQ31_2: Q31.2 R31.1
NetQ32_2: Q32.2 R32.1 | length 168.3
  TOP w20: R32.1@725,920.04 R32.1@730,925.04 ; R32.1 R32.1@730,925.04 ; Q32.2 870,930 865.04,925.04 R32.1@730,925.04
NetQ33_2: Q33.2 R33.2 | length 153.4
  TOP w20: Q33.2 624.72,924.76 R33.2
NetQ40_2: Q40.2 R40.1 | length 95
  TOP w20: Q40.2 R40.1 R40.1
NetQ41_2: Q41.2 R41.1 | length 95
  TOP w20: Q41.2 Q41.2
  TOP w30: R41.1 Q41.2
NetQ42_2: Q42.2 R42.1 | length 148.4
  TOP w20: Q42.2 1989.72,924.76 R42.1
NetQ43_2: Q43.2 R43.2 | length 148.4
  TOP w20: R43.2 2247.99,925.04 Q43.2
PGND: 5V.K 7.2V.K 17V.K C00.2 C01.1 D32.1 D33.1 D42.1 D43.1 JP2.1 Q32.3 Q33.3 Q42.3 Q43.3 R3.1 | length 325
  TOP w20: v6@1265,1065 7.2V.K 5V.K 17V.K
  other v3: 2740,-20 2820,-20 2895,-20 2980,-20 3005,530 3005,595 3005,660 3005,730 3005,800 3005,870 3005,935 3005,1000
  other v4: 2900,1415 2930,1415 2960,1415 2900,1445 2930,1445 2960,1445 2900,1475 2930,1475 2960,1475
  other v5: 880,740.47 471.73,745.24 1845,745 2245,745
  other v6: 1265,1073
PWM1: JP1.5 R13.1 U1.3 | length 303
  TOP w20: R13.1@1064,-8.05 JP1.5@1064,97 ; JP1.5@1065,97 1065,180 1089,204 U1.3@1089,285
PWM2: JP1.4 R12.1 U1.5 | length 304
  TOP w20: R12.1@1164,-8.69 JP1.4 1164,194 1189,219 U1.5@1189,285
PWM3: JP1.3 R11.2 U1.7 | length 302.6
  TOP w20: R11.2@1264,-8.68 JP1.3@1264,97 ; JP1.3@1265,98 1265,185 1289,209 U1.7@1289,285
PWM4: JP1.2 R10.1 U1.9 | length 304.4
  TOP w20: R10.1@1364,-9 JP1.2 1364,199 1389,224 U1.9@1389,285
pads on no net: U1.2 U1.4 U1.6 U1.8 U1.12 U1.14 U1.16 U1.18

## Polygon pours and split planes (outlines as drawn)
GND on TOP "GND_L01_P148" (solid, remove dead copper, pour order 148): 2370,670 2375,665 2510,665 2565,610 2565,530 2540,505 2445,505 2430,490 2430,440 2415,425 2315,425 2290,400 2290,290 2315,265 2410,265 2425,250 2425,175 2405,155 2295,155 2225,225 2225,490 2320,585 2320,650 2335,665
17V on TOP "17V_L01_P144" (solid, remove dead copper, pour order 144): 2200,140 2180,120 2180,-30 2200,-50 2530,-50 2555,-25 2555,115 2530,140
NetL1_1 on TOP "NETL1_1_L01_P142" (solid, remove dead copper, pour order 142): 2455,275 2485,305 2675,305 2695,285 2695,50 2665,20 2595,20 2575,40 2575,130 2535,170 2480,170 2480,175 2455,200
NetQ41_2 on TOP "NETQ41_2_L01_P138" (solid, remove dead copper, pour order 138): 2370,994.96 2360,984.96 2300,984.96 2280,1004.96 2220,1004.96 2195,1029.96 2195,1069.96 2210,1084.96 2265,1084.96 2290,1109.96 2360,1109.96 2370,1099.96
NetQ40_2 on TOP "NETQ40_2_L01_P136" (solid, remove dead copper, pour order 136): 1730,985 1740,975 1800,975 1820,995 1880,995 1905,1020 1905,1060 1890,1075 1835,1075 1815,1095 1735,1095 1730,1090
NetQ30_2 on TOP "NETQ30_2_L01_P134" (solid, remove dead copper, pour order 134): 990,994.96 980,984.96 920,984.96 900,1004.96 840,1004.96 815,1029.96 815,1069.96 830,1084.96 899.96,1084.96 914.96,1099.96 990,1099.96
NetQ31_2 on TOP "NETQ31_2_L01_P132" (solid, remove dead copper, pour order 132): 355,990 365,980 425,980 445,1000 505,1000 530,1025 530,1065 515,1080 460,1080 435,1105 365,1105 355,1095
7.2V on TOP "7.2V_L01_P130" (solid, remove dead copper, pour order 130): 1150,1390 1185,1425 1290,1425 1295,1430 1295,1475 1290,1475 1280,1485 1155,1485 1130,1460 1130,1400 1140,1390
PGND on TOP "PGND_L01_P128" (solid, remove dead copper, pour order 128): 1796,791 1786,781 1786,710 1796,700 1796,698 1946,698 1952,704 1952,746 1914,784 1890,784 1883,791
7.2V on TOP "7.2V_L01_P120" (solid, remove dead copper, pour order 120): 2863,1081 2863,1024 2914,973 2941,973 2968,946 2968,699 2934,665 2818,665 2735,748 2735,955 2659,1031 2659,1467 2718,1526 2843,1526 2862,1507
PGND on TOP "PGND_L01_P118" (solid, remove dead copper, pour order 118): 2889,1029 2970,1029 3024,1083 3024,1485 2980,1529 2893,1529 2877,1513 2877,1041
BHS2 on TOP "BHS2_L01_P114" (solid, remove dead copper, pour order 114): 2142,798 2149,791 2174,791 2190,807 2321,807 2328,800 2328,750 2375,703 2667,703 2683,719 2683,959 2541,1101 2472,1101 2430,1059 2430,1012.68 2382.32,965 2348,965 2321,938 2321,891 2305,875 2195.85,875 2188,882.85 2188,893 2179,902 2146,902 2142,898
no net on TOP "NONET_L01_P112" (solid, remove dead copper, pour order 112): 2465,1094
PGND on TOP "PGND_L01_P110" (solid, remove dead copper, pour order 110): 2307,595 2302,590 2220,590 2138,672 2138,742 2144,748 2152,748 2197,793 2297,793 2307,783 2307,693
AHS2 on TOP "AHS2_L01_P108" (solid, remove dead copper, pour order 108): 1481.88,941.88 1557,1017 1557,1092 1561,1096 1629,1096 1645,1080 1645,1012 1726,931 1633,931
AHS2 on TOP "AHS2_L01_P106" (solid, remove dead copper, pour order 106): 1514,685 1731.19,685 1741,692.92 1741,770 1771,800 1900,800 1908,792 1946,792 1950,796 1950,898 1947,901 1915,901 1910,896 1910,880 1900,870 1787,870 1708,949 1409,949 1405,945 1405,732 1411,726 1473,726
no net on TOP "NONET_L01_P102" (solid, remove dead copper, pour order 102): 1650,497
AHS1 on TOP "AHS1_L01_P088" (solid, remove dead copper, pour order 88): 1013,947 1014,947 1090,1023 1090,1095 1097,1102 1171,1102 1185,1088 1185,1025 1280,930 1266,916 983,916
AHS1 on TOP "AHS1_L01_P084" (solid, remove dead copper, pour order 84): 770,901 774,905 806,905 809,902 809,885 824,870 936,870 1013,947 1307,947 1315,939 1315,716 1306,707 1008.77,707 996,717.37 996,740 936,800 824,800 784,760 774,760 770,765
BHS1 on TOP "BHS1_L01_P082" (solid, remove dead copper, pour order 82): 502.54,816.46 549,770 581,770 587,776 587,816.46
PGND on TOP "PGND_L01_P080" (solid, remove dead copper, pour order 80): 774,699 927,699 933,705 933,776 925,784 836,784 793,741 774,741 770,737 770,703
PGND on TOP "PGND_L01_P078" (solid, remove dead copper, pour order 78): 524,779 550,753 574,753 583,744 583,704 581,702 424,702 419,707 419,780 424,785 518,785
BHS1 on TOP "BHS1_L01_P076" (solid, remove dead copper, pour order 76): 347,896 348,896 366,878 522,878 547,903 583,903 587,899 587,795 360,795 335,770 335,909 351,893
BHS1 on TOP "BHS1_L01_P072" (solid, remove dead copper, pour order 72): 165,675 185,655 204.93,655 224.95,674.88 300.5,674.5 340,714 340,1035 341,1036 273,1104 173,1104 34,965 34,721 80,675
Net17V_A on TOP "Top Layer-No Net" (solid, remove dead copper, pour order 48): 1410,1415 1495,1415 1495,1245 1410,1245
no net on TOP "Top Layer-No Net" (solid, remove dead copper, pour order 46): 1325,1415
Net7.2V_A on TOP "Top Layer-No Net" (solid, remove dead copper, pour order 44): 1220,1415 1310,1415 1310,1245 1220,1245
Net5V_A on TOP "Top Layer-No Net" (solid, remove dead copper, pour order 42): 1400,1415 1400,1245 1325,1245 1325,1415
Net7.2V_A on TOP "Top Layer-No Net" (solid, remove dead copper, pour order 40): 1235,1415 1295,1415 1295,1245 1235,1245
no net on TOP "Top Layer-No Net" (solid, remove dead copper, pour order 30): 1125,1315
no net on TOP "Top Layer-No Net" (solid, remove dead copper, pour order 20): 1400,965
7.2V on Bottom "7.2V_L04_P126" (solid, remove dead copper, pour order 126): 967.79,1562 918,1511 918,1323 843,1248 540,1248 471,1317 471,1527 436,1562 214,1562 183,1531 183,1172 427,928 962,928 1149,1115 1149,1481 1147,1483 1148.3,1522.5 1148.3,1533.7 1120,1562
7.2V on Bottom "7.2V_L04_P122" (solid, remove dead copper, pour order 122): 2342.79,1562 2293,1511 2293,1323 2218,1248 1915,1248 1846,1317 1846,1527 1811,1562 1589,1562 1558,1531 1558,1172 1802,928 2337,928 2524,1115 2524,1481 2522,1483 2523.3,1522.5 2523.3,1533.7 2495,1562
GND on GND02 (split plane): 2692.9,345.89 2692.9,-98.01 78.52,-98.01 78.02,-98.06 72.16,-97.73 65.67,-96.63 59.34,-94.81 53.26,-92.29 47.49,-89.1 42.12,-85.29 37.21,-80.9 32.82,-75.99 29.01,-70.62 25.82,-64.85 23.3,-58.77 21.48,-52.44 20.38,-45.95 20.04,-39.95 20.1,-39.37 20.1,474.9 2563.89,474.9
7.2V on GND02 (split plane): 78.74,1554.71 409.9,1554.71 409.9,1117.11 267.89,975.1 20.1,975.1 20.1,1496.06 20.04,1496.64 20.38,1502.64 21.48,1509.13 23.3,1515.46 25.82,1521.55 29.01,1527.31 32.82,1532.68 37.21,1537.59 42.12,1541.98 47.49,1545.79 53.26,1548.98 59.34,1551.5 65.67,1553.32 72.16,1554.43 78.16,1554.76
BHS1 on GND02 (split plane): 669.9,833.1 418,833.1 416.05,832.71 414.4,831.6 378.4,795.6 377.29,793.95 376.9,792 376.9,710.1 20.1,710.1 20.1,964.9 270,964.9 271.95,965.29 273.6,966.4 418.6,1111.4 419.71,1113.05 420.1,1115 420.1,1554.71 669.9,1554.71
AHS1 on GND02 (split plane): 924.9,1120 925.29,1118.05 926.4,1116.4 1098.4,944.4 1100.05,943.29 1102,942.9 1329.9,942.9 1329.9,710.1 969.1,710.1 969.1,785 968.71,786.95 967.6,788.6 924.6,831.6 922.95,832.71 921,833.1 680.1,833.1 680.1,1554.71 924.9,1554.71
PGND on GND02 (split plane): 2998.7,1554.43 3005.2,1553.32 3011.52,1551.5 3017.61,1548.98 3023.37,1545.79 3028.75,1541.98 3033.66,1537.59 3038.05,1532.68 3041.86,1527.31 3045.04,1521.55 3047.56,1515.46 3049.39,1509.13 3050.49,1502.64 3050.83,1496.64 3050.77,1496.06 3050.77,-39.37 3050.83,-39.96 3050.83,-39.99 3050.49,-45.94 3049.39,-52.44 3047.56,-58.77 3045.04,-64.85 3041.86,-70.62 3038.05,-75.99 3033.66,-80.9 3028.75,-85.29 3023.37,-89.1 3017.61,-92.29 3011.52,-94.81 3005.2,-96.63 2998.7,-97.73 2992.7,-98.07 2992.13,-98.01 2992.12,-98.01 2703.1,-98.01 2703.1,348 2702.71,349.95 2701.6,351.6 2569.6,483.6 2567.95,484.71 2566,485.1 20.1,485.1 20.1,699.9 382,699.9 383.95,700.29 385.6,701.4 386.71,703.05 387.1,705 386.9,706 387.1,707 387.1,789.89 420.11,822.9 918.89,822.9 958.9,782.89 958.9,706 959,705.5 958.9,705 959.29,703.05 960.4,701.4 962.05,700.29 964,699.9 1335,699.9 1336.95,700.29 1338.6,701.4 1339.71,703.05 1340.1,705 1340.1,948 1339.71,949.95 1338.6,951.6 1336.95,952.71 1335,953.1 1104.11,953.1 935.1,1122.11 935.1,1554.71 1789.9,1554.71 1789.9,1099.11 1644.89,954.1 1385,954.1 1383.05,953.71 1381.4,952.6 1380.29,950.95 1379.9,949 1379.9,705 1380.29,703.05 1381.4,701.4 1383.05,700.29 1385,699.9 1759,699.9 1760.95,700.29 1762.6,701.4 1763.71,703.05 1764.1,705 1764,705.5 1764.1,706 1764.1,788.89 1797.11,821.9 2295.89,821.9 2335.9,781.89 2335.9,705 2336.29,703.05 2337.4,701.4 2339.05,700.29 2341,699.9 2710,699.9 2711.95,700.29 2713.6,701.4 2714.71,703.05 2715.1,705 2715.1,970 2714.71,971.95 2713.6,973.6 2711.95,974.71 2710,975.1 2457.11,975.1 2310.1,1122.11 2310.1,1554.71 2992.13,1554.71 2992.7,1554.76
AHS2 on GND02 (split plane): 2044.9,832.1 1795,832.1 1793.05,831.71 1791.4,830.6 1755.4,794.6 1754.29,792.95 1753.9,791 1753.9,710.1 1390.1,710.1 1390.1,943.9 1647,943.9 1648.95,944.29 1650.6,945.4 1798.6,1093.4 1799.71,1095.05 1800.1,1097 1800.1,1554.71 2044.9,1554.71
BHS2 on GND02 (split plane): 2299.9,1120 2300.29,1118.05 2301.4,1116.4 2451.4,966.4 2453.05,965.29 2455,964.9 2704.9,964.9 2704.9,710.1 2346.1,710.1 2346.1,784 2345.71,785.95 2344.6,787.6 2301.6,830.6 2299.95,831.71 2298,832.1 2055.1,832.1 2055.1,1554.71 2299.9,1554.71
17V on POWER03 (split plane): 2762.78,823.28 2762.78,-98.01 78.52,-98.01 78.02,-98.06 72.16,-97.73 65.67,-96.63 59.34,-94.81 53.26,-92.29 47.49,-89.1 42.12,-85.29 37.21,-80.9 32.82,-75.99 29.01,-70.62 25.82,-64.85 23.3,-58.77 21.48,-52.44 20.38,-45.95 20.04,-39.95 20.1,-39.37 20.1,1114.9 2540.36,1114.9
"7.2V In" on POWER03 (split plane): 3050.77,-39.37 3050.83,-39.96 3050.83,-39.99 3050.49,-45.94 3049.39,-52.44 3047.56,-58.77 3045.04,-64.85 3041.86,-70.62 3038.05,-75.99 3033.66,-80.9 3028.75,-85.29 3023.37,-89.1 3017.61,-92.29 3011.52,-94.81 3005.2,-96.63 2998.7,-97.73 2992.7,-98.07 2992.13,-98.01 2992.12,-98.01 2772.98,-98.01 2772.98,249.4 2773.1,250 2773.1,327 2772.98,327.6 2772.98,819.9 3050.77,819.9
7.2V on POWER03 (split plane): 78.74,1554.71 2992.13,1554.71 2992.7,1554.76 2998.7,1554.43 3005.2,1553.32 3011.52,1551.5 3017.61,1548.98 3023.37,1545.79 3028.75,1541.98 3033.66,1537.59 3038.05,1532.68 3041.86,1527.31 3045.04,1521.55 3047.56,1515.46 3049.39,1509.13 3050.49,1502.64 3050.83,1496.64 3050.77,1496.06 3050.77,830.1 2770.4,830.1 2546.93,1123.09 2546.68,1123.32 2546.49,1123.6 2545.94,1123.97 2545.44,1124.41 2545.12,1124.52 2544.83,1124.71 2544.19,1124.84 2543.56,1125.05 2543.22,1125.03 2542.88,1125.1 20.1,1125.1 20.1,1496.06 20.04,1496.64 20.38,1502.64 21.48,1509.13 23.3,1515.46 25.82,1521.55 29.01,1527.31 32.82,1532.68 37.21,1537.59 42.12,1541.98 47.49,1545.79 53.26,1548.98 59.34,1551.5 65.67,1553.32 72.16,1554.43 78.16,1554.76

## Keep-outs
Keep-Out Layer:
  lines w10: 78.52,-118.11 2992.12,-118.11 ; 78.74,-118.11 cw(c78.74,-39.37) 0,-39.37 0,1496.06 cw(c78.74,1496.06) 78.74,1574.8 2992.13,1574.8 cw(c2992.13,1496.06) 3070.87,1496.06 3070.87,-39.37 cw(c2992.13,-39.37) 2992.13,-118.11

## Other copper
TOP:
  text "合肥工业大学" at 590,1170 h30
  text "OnTheWay" at 607.2,1139.37 h30
  text "十七届摄像头" at 590,1105 h30
  text "2021.12.30" at 610,1070 h30
GND02 (plane layer: these items are gaps in the copper):
  lines w10: 2,480 2566,480 2698,348 2698,-115 ; 10,970 10,705 382,705 ; 20,970 270,970 415,1115 415,1574.8 675,1574.8 ; 382,707 382,792 418,828 674,828 921,828 964,785 964,706 ; 675,828 675,1574.8 ; 930,1574.8 675,1574.8 ; 930,1575 930,1120 1102,948 1335,948 1335,705 964,705 ; 1759,705 1385,705 1385,949 1647,949 1795,1097 1795,1574.8 2050,1574.8 ; 1759,706 1759,791 1795,827 2051,827 2298,827 2341,784 2341,705 2710,705 2710,970 2455,970 2305,1120 2305,1575 ; 2050,827 2050,1574.8 ; 2305,1574.8 2050,1574.8
POWER03 (plane layer: these items are gaps in the copper):
  lines w10: 0,1120 2542.88,1120 2767.88,825 ; 2485,250 2565,250 ; 2767.88,-120 2767.88,825 ; 2768,250 2768,327 ; 3070,825 2767.88,825 ; 3070,840 3070,1050

## Silkscreen, mask and mechanical layers (free items; w line width, h text height)
Top Overlay:
  text "IR2184_Motor_Drive_V1.0" at 1414.17,-55.32 h30
Mechanical 1:
  lines w10: 78.52,-118.11 2992.13,-118.11 ccw(c2992.13,-39.37) 3070.87,-39.37 3070.87,1496.06 ccw(c2992.13,1496.06) 2992.13,1574.8 78.74,1574.8 ccw(c78.74,1496.06) 0,1496.06 0,-39.37 ccw(c78.74,-39.37) 78.74,-118.11

## Dimensions
78.52,-118.11 to 78.74,1574.8 on Mechanical 1
0,-39.37 to 3070.87,-39.37 on Mechanical 1